# EAGLE board lcd-interface (EAGLE 5.02)
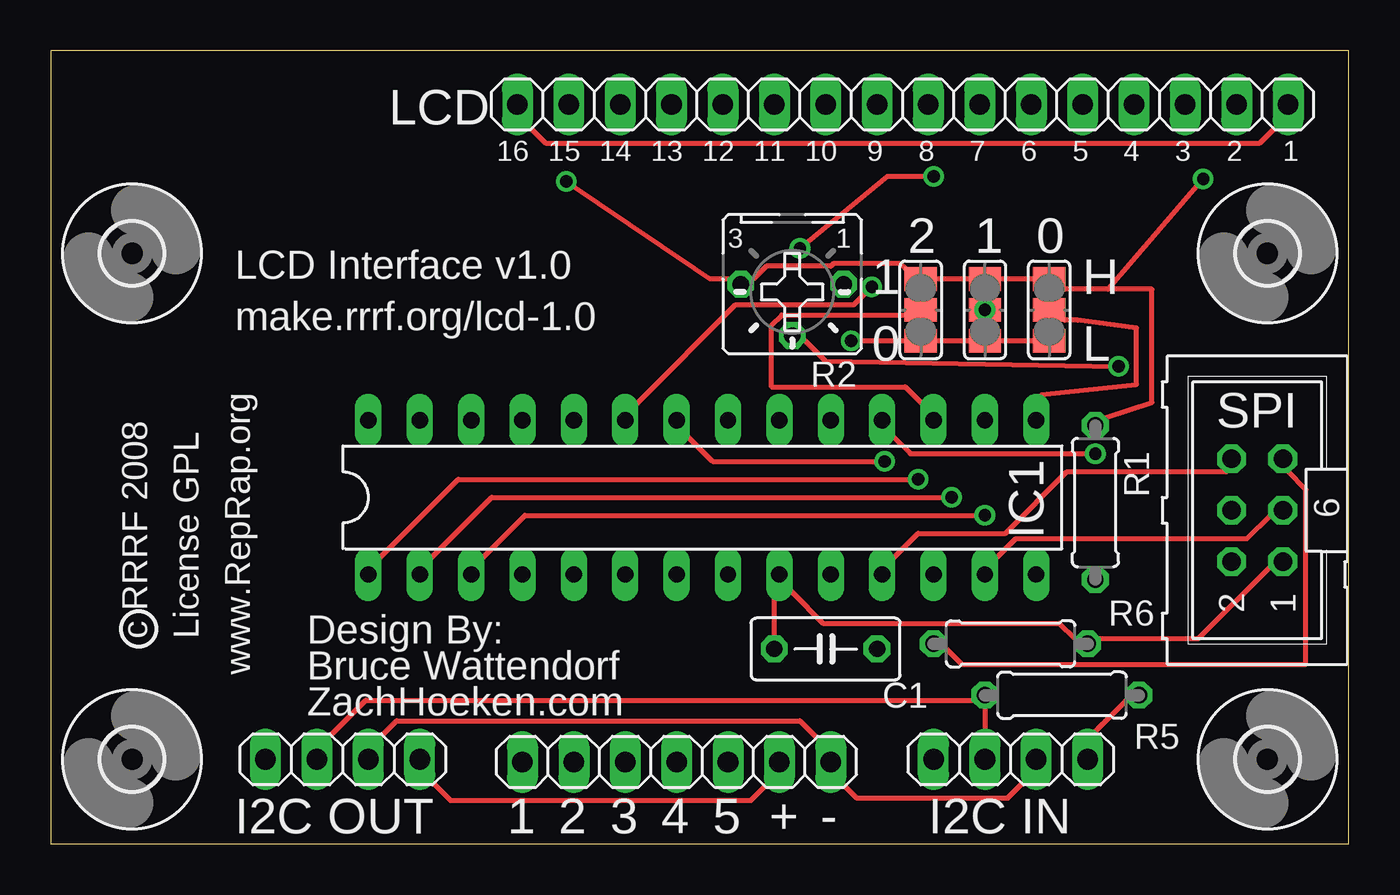
[diagram p0: board, top side]
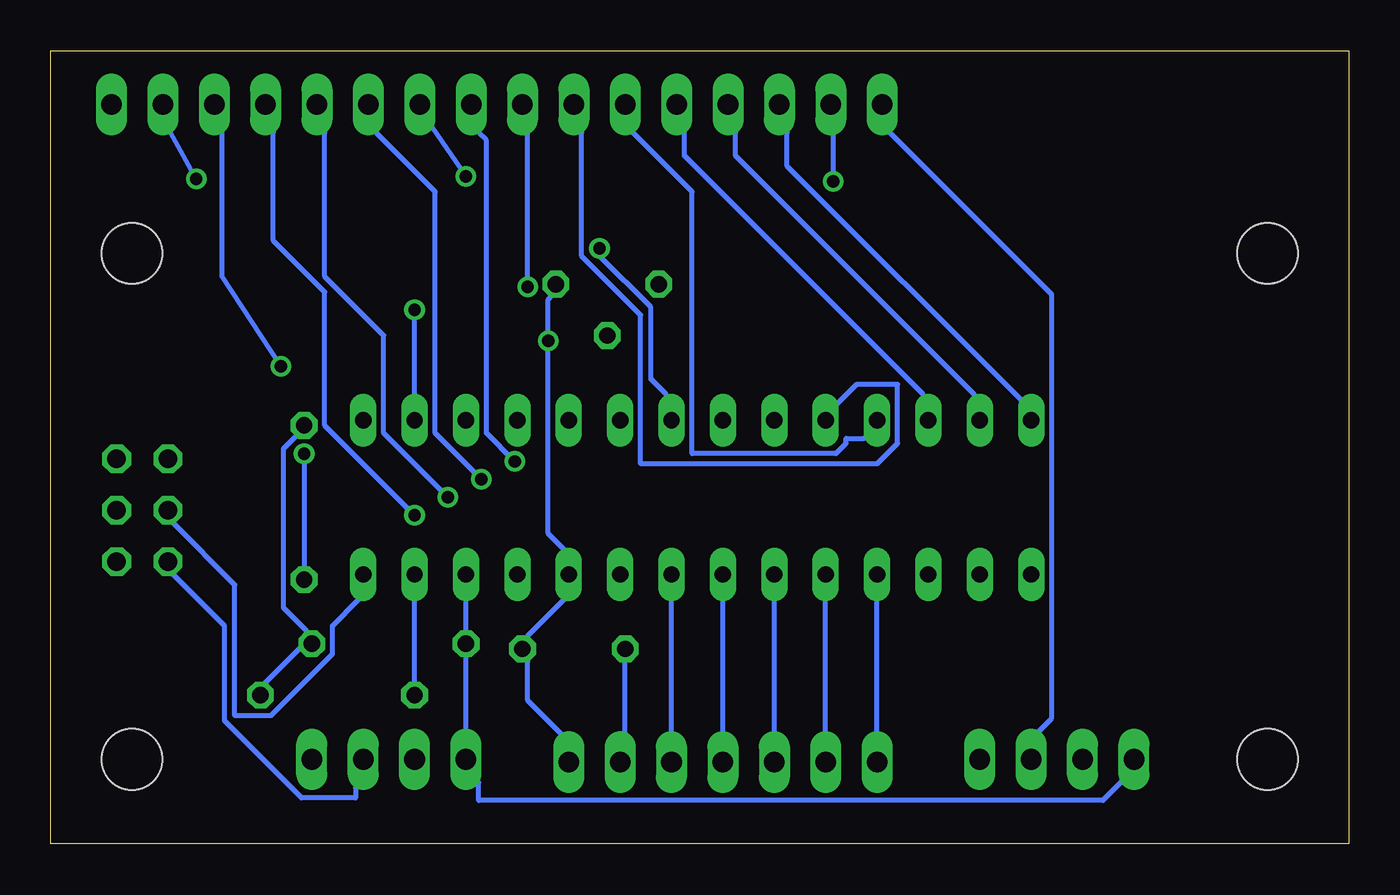
[diagram p1: board, bottom side, seen from below]

Size 64.19 x 39.23 mm. Coordinates in mm from the lower left corner, seen from the top.
Outline: 0,0 64.19,0 64.19,39.23 0,39.23 0,0
Copper layers (1*16): Top 0.035mm / dielectric 1.5mm / Bottom 0.035mm
Design rules "default": minimum track width 10mil, minimum drill 24mil, track to track 8mil, track to pad 8mil, pad to pad 8mil, via to via 8mil, smd to smd 8mil, copper to edge 40mil, drill to drill 8mil, minimum pad ring 10mil, minimum via ring 8mil, stop-mask expansion 4mil, vias tented up to drill 0mil, thermal gap 10mil

## Footprints (pad centres in the part's own frame; a part is rotated, then mirrored left to right if it is on the bottom)
C050-030X075 = drill 0.813 octagon: 1 -2.54,0; 2 2.54,0
3,0 = hole 3: 0,0
DIL28-3 = drill 0.813 long: 1 -16.51,-3.81; 2 -13.97,-3.81; 3 -11.43,-3.81; 4 -8.89,-3.81; 5 -6.35,-3.81; 6 -3.81,-3.81; 7 -1.27,-3.81; 8 1.27,-3.81; 9 3.81,-3.81; 10 6.35,-3.81; 11 8.89,-3.81; 12 11.43,-3.81; 13 13.97,-3.81; 14 16.51,-3.81; 15 16.51,3.81; 16 13.97,3.81; 17 11.43,3.81; 18 8.89,3.81; 19 6.35,3.81; 20 3.81,3.81; 21 1.27,3.81; 22 -1.27,3.81; 23 -3.81,3.81; 24 -6.35,3.81; 25 -8.89,3.81; 26 -11.43,3.81; 27 -13.97,3.81; 28 -16.51,3.81
1X07 = drill 1.016 long: 1 -7.62,0; 2 -5.08,0; 3 -2.54,0; 4 0,0; 5 2.54,0; 6 5.08,0; 7 7.62,0
1X04 = drill 1.016 long: 1 -3.81,0; 2 -1.27,0; 3 1.27,0; 4 3.81,0
1X16 = drill 1.016 long: 1 -19.05,0; 2 -16.51,0; 3 -13.97,0; 4 -11.43,0; 5 -8.89,0; 6 -6.35,0; 7 -3.81,0; 8 -1.27,0; 9 1.27,0; 10 3.81,0; 11 6.35,0; 12 8.89,0; 13 11.43,0; 14 13.97,0; 15 16.51,0; 16 19.05,0
0207/7 = drill 0.813 octagon: 1 -3.81,0; 2 3.81,0
B25P = drill 0.813 octagon: A -2.54,0; E 2.54,0; S 0,2.54
SJ_2 = smd 1.168 x 1.6: 1 -1.524,0; 2 0,0; 3 1.524,0
ML6 = drill 0.914 octagon: 1 -2.54,-1.27; 2 -2.54,1.27; 3 0,-1.27; 4 0,1.27; 5 2.54,-1.27; 6 2.54,1.27

## Placement (x,y rotation side)
C1  100nF  [C050-030X075]  38.32,9.65 0 top
H1  MOUNT-HOLE3.0  [3,0]  4.03,29.2 0 top
H2  MOUNT-HOLE3.0  [3,0]  4.03,4.19 0 top
H3  MOUNT-HOLE3.0  [3,0]  60.16,4.19 0 top
H4  MOUNT-HOLE3.0  [3,0]  60.16,29.2 0 top
IC1  MCP23S17SP  [DIL28-3]  32.22,17.14 0 top
JP1  [1X07]  30.95,4.06 180 top
JP2  [1X04]  47.46,4.19 0 top
JP3  [1X04]  14.44,4.19 0 top
JP4  [1X16]  42.13,36.57 180 top
R1  10k  [0207/7]  51.65,16.89 270 top
R2  10K  [B25P]  36.66,27.68 180 top
R5  10k  [0207/7]  50,7.36 0 top
R6  10k  [0207/7]  47.46,9.9 0 top
SJ1  [SJ_2]  49.37,26.41 270 top
SJ2  [SJ_2]  46.19,26.41 270 top
SJ3  [SJ_2]  43.02,26.41 270 top
SV1  [ML6]  59.65,16.51 90 top

## Library data of the parts
C1 = rcl
H1-H4 = holes
IC1 = microchip
JP1-JP4 = pinhead
R1 R5 R6 = resistor
R2 = pot
SJ1-SJ3 = SparkFun
SV1 = con-harting-ml

## Nets
1A0: IC1.15 SJ1.2
1A1: IC1.16 SJ2.2
1A2: IC1.17 SJ3.2
B1: IC1.4 JP1.7
B2: IC1.5 JP1.6
B3: IC1.6 JP1.5
B4: IC1.7 JP1.4
B5: IC1.8 JP1.3
CONTR: JP4.3 R2.S
CS: IC1.11 SV1.6
D0: IC1.21 JP4.7
D1: IC1.22 JP4.8
D2: IC1.23 JP4.9
D3: IC1.24 JP4.10
D4: IC1.25 JP4.11
D5: IC1.26 JP4.12
D6: IC1.27 JP4.13
D7: IC1.28 JP4.14
E: IC1.1 JP4.6
GND: C1.2 IC1.10 JP1.1 JP2.3 JP3.3 JP4.1 JP4.16 R2.A SJ1.3 SJ2.3 SJ3.3 SV1.2
INT: IC1.19
MISO: IC1.14 SV1.4
N$10: IC1.18 R1.2
RS: IC1.3 JP4.4
RW: IC1.2 JP4.5
SCL: IC1.12 JP2.1 JP3.1 R6.1 SV1.5
SDA: IC1.13 JP2.2 JP3.2 R5.1 SV1.3
VCC: C1.1 IC1.9 JP1.2 JP2.4 JP3.4 JP4.2 JP4.15 R1.1 R2.E R5.2 R6.2 SJ1.1 SJ2.1 SJ3.1 SV1.1

## Tracks (layer width: path | path; a pad name or v marks a point on that pad's centre or on a via)
1A0
  Top 0.254: SJ1.2 50.13,25.9 50.76,25.9 53.68,25.52 53.68,22.73 48.98,22.22 IC1.15
1A1  (via drill 0.61)
  Bottom 0.254: IC1.16 SJ2.2
  other vias: 46.19,26.41
1A2
  Top 0.254: SJ3.2 42.25,26.16 36.16,26.16 35.65,25.65 35.65,22.6 42.25,22.6 43.02,21.84 IC1.17
B1
  Bottom 0.254: JP1.7 IC1.4
B2
  Bottom 0.254: JP1.6 IC1.5
B3
  Bottom 0.254: JP1.5 IC1.6
B4
  Bottom 0.254: JP1.4 IC1.7
B5
  Bottom 0.254: JP1.3 IC1.8
CONTR  (via drill 0.61)
  Top 0.254: v52.79,23.62 38.32,23.87 37.3,24.89 R2.S
  Bottom 0.254: v52.79,23.62 55.71,28.06 55.71,35.17 JP4.3
CS
  Top 0.254: IC1.11 41.74,14.22 42.89,15.36 47.21,15.36 50.25,18.41 58.13,18.41 SV1.6
D0  (via drill 0.61)
  Top 0.254: v37.05,29.46 41.36,33.02 v43.65,33.02
  Bottom 0.254: v37.05,29.46 37.05,29.08 34.51,26.54 34.51,22.98 33.74,22.22 IC1.21 | v43.65,33.02 45.3,35.43 JP4.7
D1  (via drill 0.61)
  Top 0.254: v41.24,18.92 32.73,18.92 31.59,20.06 IC1.22
  Bottom 0.254: v41.24,18.92 42.63,20.31 42.63,34.79 43.02,35.17 JP4.8
D2  (via drill 0.61)
  Top 0.254: v40.6,27.55 39.71,26.66 33.87,26.66 29.04,21.84 IC1.23
  Bottom 0.254: v40.6,27.55 40.6,35.17 JP4.9
D3
  Bottom 0.254: IC1.24 25.23,21.84 24.35,22.73 22.31,22.73 22.31,19.81 23.33,18.79 35.01,18.79 35.01,26.16 37.94,29.08 37.94,35.17 JP4.10
D4
  Bottom 0.254: IC1.25 23.96,20.06 24.85,20.06 24.85,19.81 25.36,19.3 32.47,19.3 32.47,32.25 35.4,35.17 JP4.11
D5
  Bottom 0.254: IC1.26 21.04,22.22 32.85,34.03 32.85,35.17 JP4.12
D6
  Bottom 0.254: IC1.27 18.5,22.22 30.31,34.03 30.31,35.17 JP4.13
D7
  Bottom 0.254: IC1.28 16.22,21.97 27.77,33.52 27.77,35.17 JP4.14
E  (via drill 0.61)
  Top 0.254: v42.89,18.03 20.16,18.03 16.34,14.22 IC1.1
  Bottom 0.254: v42.89,18.03 45.17,20.31 45.17,32.25 48.09,35.17 JP4.6
GND  (via drill 0.61)
  Top 0.254: SJ1.3 SJ2.3 SJ3.3 v39.59,24.89 | JP3.3 16.34,5.33 17.11,6.09 37.05,6.09 37.94,5.2 JP1.1 39.2,2.92 39.84,2.28 47.33,2.28 48.09,3.04 JP2.3 | JP4.1 60.54,35.43 59.78,34.67 24.47,34.67 23.71,35.43 JP4.16
  Bottom 0.254: SV1.2 58.13,13.33 55.59,10.79 55.59,6.09 51.78,2.28 49.11,2.28 49.11,2.79 JP2.3 | R2.A 39.46,27.05 39.59,26.92 v39.59,24.89 39.59,15.36 38.82,14.6 IC1.10 38.82,12.06 40.6,10.28 C1.2 40.6,9.01 40.6,7.11 38.95,5.46 JP1.1 | JP4.16 22.7,35.17 14.69,27.17 14.69,6.22 15.33,5.58 JP3.3
MISO
  Bottom 0.254: IC1.14 48.98,12.06 50.25,10.79 50.25,9.39 53.3,6.34 55.08,6.34 55.08,12.82 58.13,15.87 SV1.4
N$10  (via drill 0.61)
  Top 0.254: v51.65,19.3 42.51,19.3 41.74,20.06 IC1.18
  Bottom 0.254: v51.65,19.3 R1.2
RS  (via drill 0.61)
  Top 0.254: v46.19,16.25 23.46,16.25 21.43,14.22 IC1.3
  Bottom 0.254: v46.19,16.25 50.63,20.7 50.63,27.3 53.17,29.84 53.17,35.17 JP4.4
RW  (via drill 0.61)
  Top 0.254: v44.54,17.14 21.81,17.14 18.88,14.22 IC1.2
  Bottom 0.254: v44.54,17.14 47.71,20.31 47.71,25.14 50.63,28.06 50.63,35.17 JP4.5
SCL
  Top 0.254: SV1.5 61.18,18.41 62.07,17.52 62.07,8.88 45.05,8.88 44.28,9.65 R6.1
  Bottom 0.254: IC1.12 R6.1 JP2.1 43.02,3.04 43.02,2.15 12.15,2.15 11.27,3.04 JP3.1
SDA
  Top 0.254: JP2.2 R5.1 45.55,7.11 15.58,7.11 13.8,5.33 JP3.2 | SV1.3 60.29,16.25 59.14,15.11 47.71,15.11 46.83,14.22 IC1.13
  Bottom 0.254: R5.1 IC1.13
VCC  (via drill 0.61)
  Top 0.254: C1.1 35.78,12.06 IC1.9 36.66,12.44 38.19,10.92 49.87,10.92 50.63,10.15 R6.2 51.91,10.15 56.73,10.15 60.29,13.71 SV1.1 | JP3.4 18.88,3.04 19.77,2.15 34.63,2.15 35.4,2.92 JP1.2 | R5.2 53.17,7.11 51.65,5.58 JP2.4 | 52.29,27.43 50.13,27.43 SJ1.1 SJ2.1 SJ3.1 42.25,28.44 42,28.7 38.7,28.7 38.57,28.57 35.4,28.57 34.76,27.94 R2.E 33.49,27.94 32.6,27.94 v25.49,32.76 | 52.29,27.43 54.45,27.43 54.45,21.84 52.16,21.08 R1.1 | 52.29,27.43 v56.98,32.89
  Bottom 0.254: C1.1 35.78,5.46 JP1.2 | R5.2 53.56,8 51.91,9.65 R6.2 51.52,10.54 52.67,11.68 52.67,19.55 52.03,20.19 R1.1 | v25.49,32.76 25.49,35.17 JP4.15 | v56.98,32.89 58.26,35.17 JP4.2

## Text on the board
tPlace: LCD | 16 | 15 | 14 | 13 | 12 | 11 | 10 | 9 | 8 | 7 | 6 | 5 | 4 | 3 | 2 | 1 | 2 | 1 | 0 | LCD Interface v1.0 | 1 | H | make.rrrf.org/lcd-1.0 | 0 | L | SPI | c RRRF 2008 | License GPL | Design By: | www.RepRap.org | Bruce Wattendorf | ZachHoeken.com | I2C OUT | 1 | 2 | 3 | 4 | 5 | + | - | I2C IN